# EAGLE board BlinkyBoard_ProbsNotGoodButSavingAnyway (EAGLE 9.0.1)
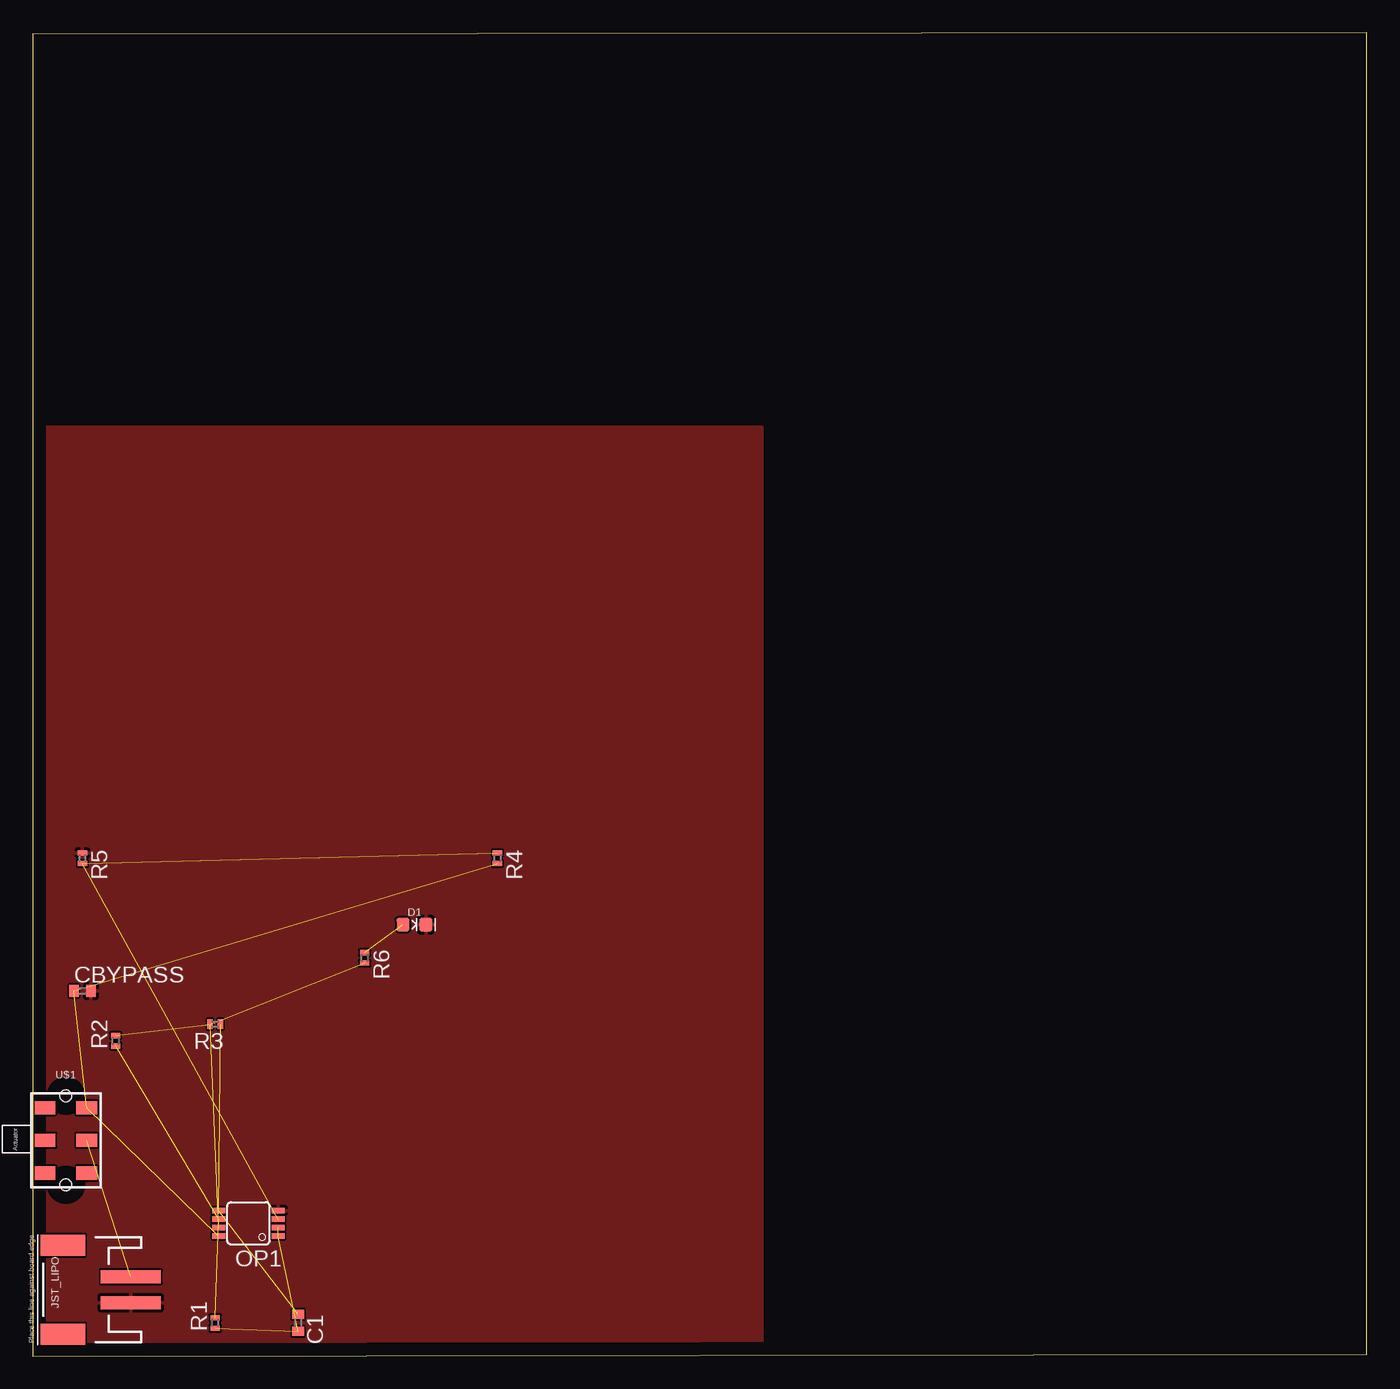
[diagram p0: board, top side]

Size 102.09 x 101.27 mm. Coordinates in mm from the lower left corner, seen from the top.
Outline: 0,0 102.09,0.13 102.09,101.27 0,101.14 0,0
Copper layers (1*16): Top 0.035mm / dielectric 1.5mm / Bottom 0.035mm
Design rules "default": minimum track width 6mil, minimum drill 0.35mm, track to track 6mil, track to pad 6mil, pad to pad 6mil, via to via 6mil, smd to smd 6mil, copper to edge 40mil, drill to drill 6mil, minimum pad ring 10mil, minimum via ring 8mil, stop-mask expansion 4mil, vias tented up to drill 0mil, thermal gap 10mil

## Footprints (pad centres in the part's own frame; a part is rotated, then mirrored left to right if it is on the bottom)
C0402 = smd 0.7 x 0.9: 1 -0.65,0; 2 0.65,0
LED-0603 = smd 1 x 1: A -0.877,0; C 0.877,0
JST-2-SMD = smd 1 x 4.6: 1 -1,-3.7; 2 1,-3.7 | smd 1.6 x 3.4: NC1 -3.4,1.5; NC2 3.4,1.5
MSOP08 = smd 0.4 x 1: 1 -0.976,-2.263; 2 -0.326,-2.263; 3 0.324,-2.263; 4 0.974,-2.263; 5 0.974,2.262; 6 0.324,2.262; 7 -0.326,2.262; 8 -0.976,2.262
R0402 = smd 0.4 x 0.7: 1 -0.4,0; 2 0.4,0
SWITCH.00.THT = smd 1 x 1.6: 1 -2.5,1.6; 2 0,1.6; 3 2.5,1.6; 5 -2.5,-1.6; 6 0,-1.6; 7 2.5,-1.6 | hole 0.9: -3.4,0; 3.4,0

## Placement (x,y rotation side)
C1  100 n  [C0402]  20.32,2.54 270 top
CBYPASS  100 n  [C0402]  3.81,27.94 0 top
D1  [LED-0603]  29.21,33.02 0 top
JST_LIPO  3.7 V  [JST-2-SMD]  3.81,5.08 90 top
LOGO1  OSHW-LOGOL-COPPER  [OSHW-LOGO-L_COPPER]  -25.4,19.05 0 top  (outside the outline)
OP1  [MSOP08]  16.51,10.16 90 top
R1  10 k  [R0402]  13.97,2.54 90 top
R2  10 k  [R0402]  6.35,24.13 90 top
R3  3.3 M  [R0402]  13.97,25.4 180 top
R4  10 k  [R0402]  35.56,38.1 270 top
R5  10 k  [R0402]  3.81,38.1 270 top
R6  300  [R0402]  25.4,30.48 270 top
U$1  SWITCH.JS202011JXQN  [SWITCH.00.THT]  2.54,16.51 270 top
U$4  REVISION.A  [REV.A]  -33.02,10.16 0 top  (outside the outline)
U$5  LINNES.LAB.LOGO  [LINNES.LAB.LOGO]  -21.59,8.89 0 top  (outside the outline)

## Library data of the parts
C1 CBYPASS R1-R6 = CalvEngIO-Passives
D1 = CalvEngIO-LED
JST_LIPO = CalvEngIO-Connectors; PROD_ID: CONN-11443; SF_ID: PRT-08612
LOGO1 U$5 = CalvEngIO-Logos
OP1 = CalvEngIO-AnalogIC; MF: ALTERA CORPORATION; MPN: AD8607ARMZ-REEL; OC_FARNELL: 1464990; OC_NEWARK: 59K6925
U$1 = CalvEngIO-Switches
U$4 = CalvEngIO-Symbols

## Nets
GND: CBYPASS.2 D1.C JST_LIPO.1 OP1.4 R5.1
N$1: JST_LIPO.2 U$1.2
N$2: CBYPASS.1 OP1.8 R4.2 U$1.1
N$3: OP1.3 R4.1 R5.2
N$4: C1.2 OP1.1 OP1.2 R1.1
N$5: OP1.6 R1.2 R2.1
N$6: C1.1 OP1.5 R3.1
N$7: OP1.7 R2.2 R3.2 R6.2
N$8: D1.A R6.1

## Tracks (layer width: path | path; a pad name or v marks a point on that pad's centre or on a via)
GND
  pour Top: -3.81,69.85 -3.81,-3.81 -6.35,-6.35 54.61,-6.35 55.88,-5.08 55.88,71.12 -2.54,71.12
N$1  (1 unrouted)
N$2  (3 unrouted)
N$3  (2 unrouted)
N$4  (3 unrouted)
N$5  (2 unrouted)
N$6  (2 unrouted)
N$7  (3 unrouted)
N$8  (1 unrouted)